# Allegro board DUBLA1 P4.brd
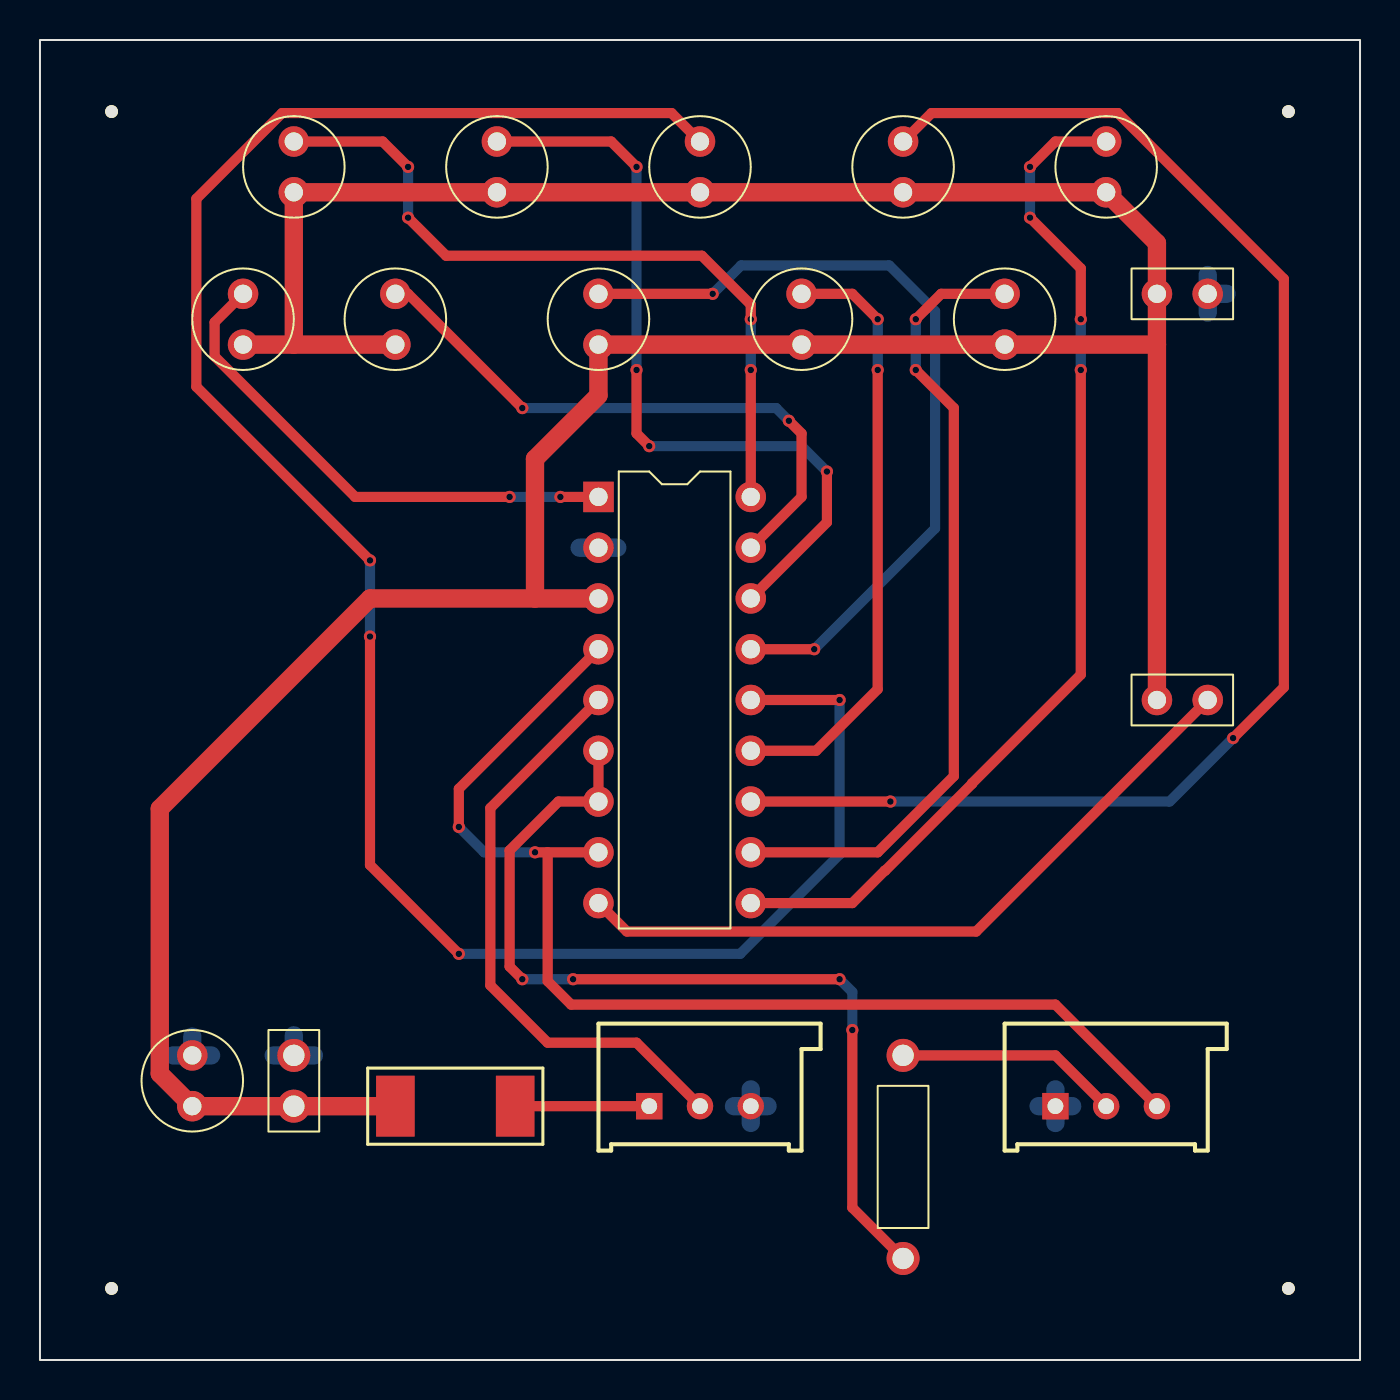
[diagram p0: board, top side]
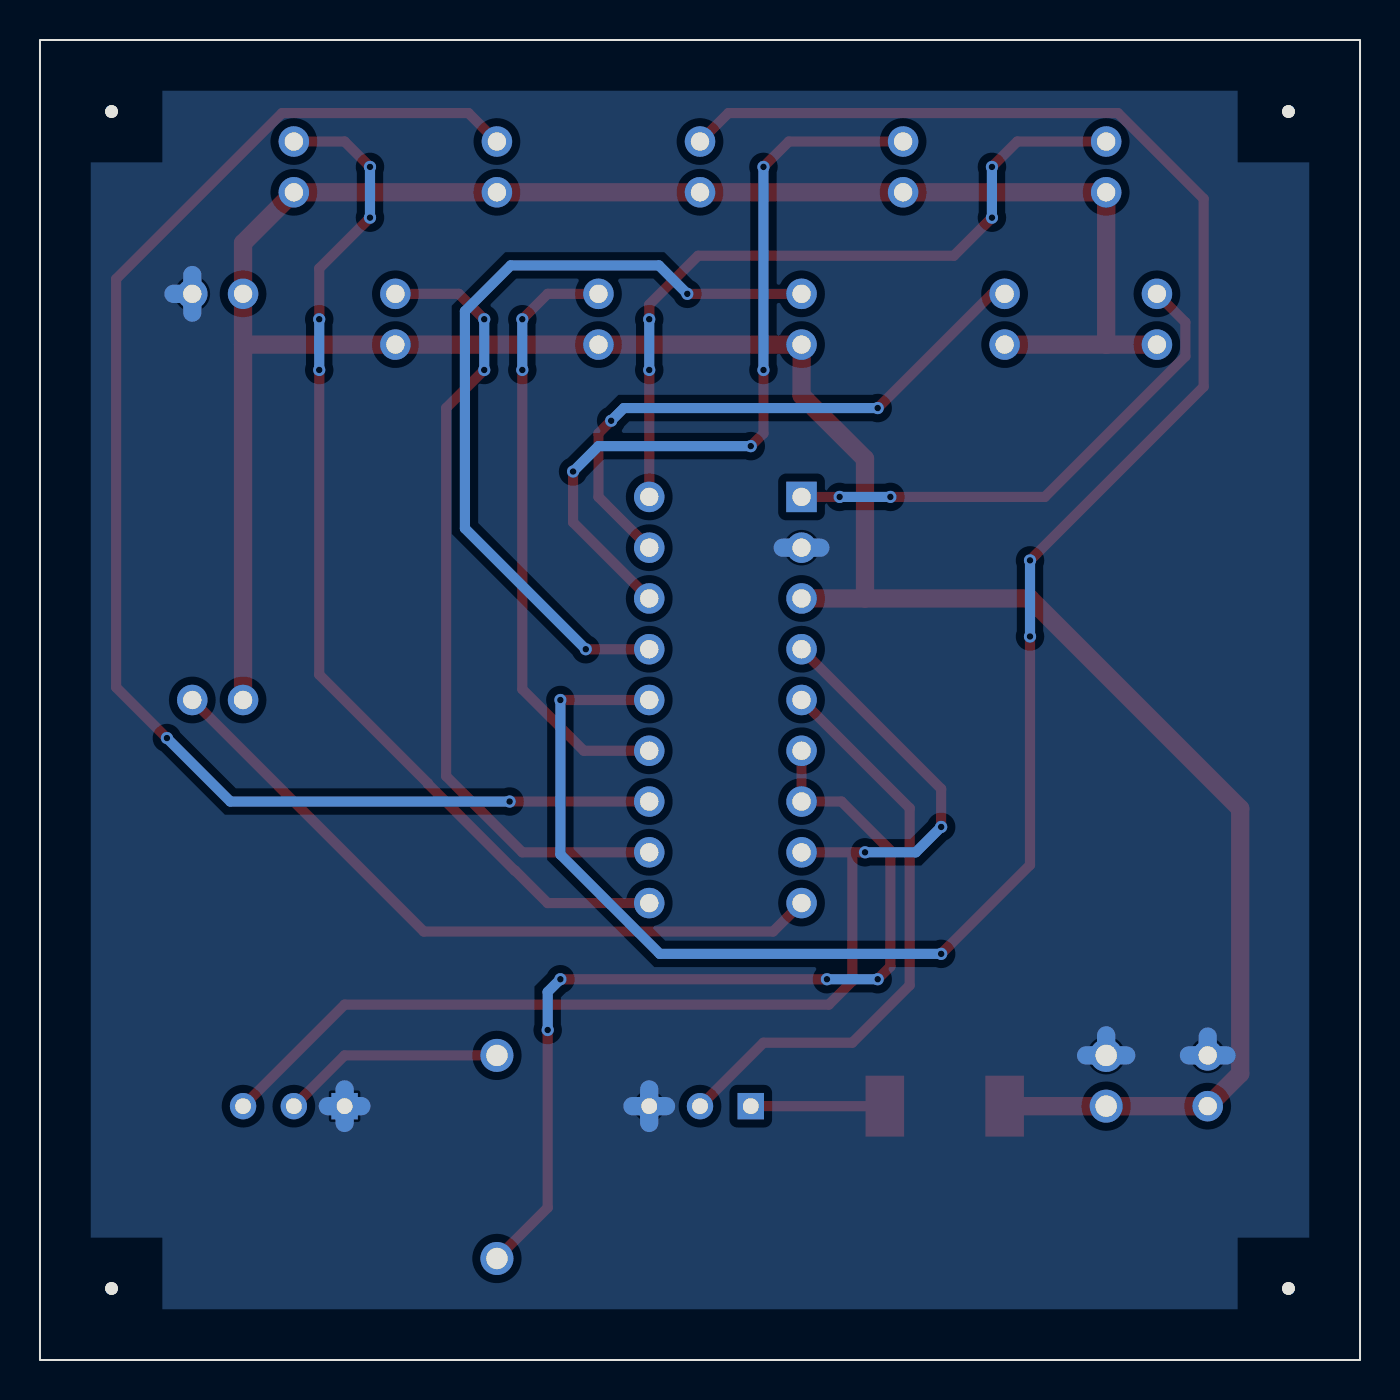
[diagram p1: board, bottom side, seen from below]

Outline 66.04 x 66.04 mm; copper layers: TOP, BOTTOM. Coordinates in mm from the lower left corner of the outline.
Outline path: rectangle 0,0 66.04,66.04

## Design rules (mm)
nets with their own width: min track width 0.508; nets N00786 N00798 N00816 N00828 N01011 N01038 N01063 N01185 N01208 N01233 N01392 N01765 N01847 N02323 N05807 N05934
nets with their own width: min track width 0.914; nets +12V GND

## Placement (name value [footprint] x y rotation side)
C1  10uF/50V  [CAP196]  7.62 12.7 0 top
C2  100nF  [CAPCK05]  12.7 12.7 0 top
CN1  BATTERY 12 VDC  [JUMPER2]  55.88 53.34 0 top
D1  YELLOW LED  [CAP196]  10.16 50.8 0 top
D2  YELLOW LED  [CAP196]  12.7 58.42 0 top
D3  YELLOW LED  [CAP196]  17.78 50.8 0 top
D4  GREEN LED  [CAP196]  22.86 58.42 0 top
D5  GREEN LED  [CAP196]  27.94 50.8 0 top
D6  GREEN LED  [CAP196]  33.02 58.42 0 top
D7  GREEN LED  [CAP196]  38.1 50.8 0 top
D8  GREEN LED  [CAP196]  43.18 58.42 0 top
D9  RED LED  [CAP196]  48.26 50.8 0 top
D10  RED LED  [CAP196]  53.34 58.42 0 top
J1  MODE JUMPER  [JUMPER2]  55.88 33.02 0 top
NOREF  -  [unnamed]  62.46 62.46 0 top
NOREF#2  -  [unnamed]  62.46 3.58 0 top
NOREF#3  -  [unnamed]  3.58 62.46 0 top
NOREF#4  -  [unnamed]  3.58 3.58 0 top
PR1  4.7K/5K PRESET  [VRES55]  50.8 12.7 0 top
PR2  4.7K/5K PRESET  [VRES55]  30.48 12.7 0 top
R1  4.7k  [SMR2512]  17.78 12.7 0 top
R2  1.2 K  [RES400]  43.18 5.08 0 top
U1  LM3914  [DIP18_3]  27.94 43.18 0 top

## Library data of the parts
C1 = CP: Tolerance: ***; User Part Number: ***
C2 = C: Tolerance: ***; User Part Number: ***
CN1 = CON2: User Part Number: ***
D1-D10 = LED: Tolerance: ***; User Part Number: ***
J1 = JUMPER_1: User Part Number: ***
PR1 PR2 = POT
R1 = R
R2 = R: Tolerance: ***; User Part Number: ***
U1 = LM3914: Tolerance: ***; User Part Number: ***

## Footprints (pads in the part's own frame, mm; a bottom-side part is the same pattern mirrored in y, then rotated)
CAP196
  round 1.524 hole 0.914: 1(0,0) 2(0,2.54)
CAPCK05
  round 1.651 hole 1.067: 1(0,0) 2(0,2.54)
DIP18_3
  rect 1.524x1.524 hole 0.914: 1(0,0)
  round 1.524 hole 0.914: 2(0,-2.54) 3(0,-5.08) 4(0,-7.62) 5(0,-10.16) 6(0,-12.7) 7(0,-15.24) 8(0,-17.78) 9(0,-20.32) 10(7.62,-20.32) 11(7.62,-17.78) 12(7.62,-15.24) 13(7.62,-12.7) 14(7.62,-10.16) 15(7.62,-7.62) 16(7.62,-5.08) 17(7.62,-2.54) 18(7.62,0)
JUMPER2
  round 1.524 hole 0.914: 1(0,0) 2(2.54,0)
RES400
  round 1.651 hole 1.067: 1(0,0) 2(0,10.16)
SMR2512
  rect 1.93x3.048 smd: 1(0,0) 2(5.994,0)
unnamed
  round 0.635 hole 3.175 unplated: (0,0)
VRES55
  rect 1.321x1.321 hole 0.787: 1(0,0)
  round 1.321 hole 0.787: 2(2.54,0) 3(5.08,0)

## Nets
+12V: C1.1 C2.1 CN1.1 D1.1 D2.1 D3.1 D4.1 D5.1 D6.1 D7.1 D8.1 D9.1 D10.1 J1.1 R1.1 U1.3
GND: C1.2 C2.2 CN1.2 PR1.1 PR2.3 U1.2(V-)
N00786: D1.2(CATHODE) U1.1
N00798: D2.2(CATHODE) U1.18
N00816: D3.2(CATHODE) U1.17
N00828: D4.2(CATHODE) U1.16
N01011: D5.2(CATHODE) U1.15
N01038: D6.2(CATHODE) U1.14
N01063: D7.2(CATHODE) U1.13
N01185: D8.2(CATHODE) U1.12
N01208: D9.2(CATHODE) U1.11
N01233: D10.2(CATHODE) U1.10
N01392: PR2.1 R1.2
N01765: R2.1 U1.6 U1.7
N01847: PR1.3 U1.4 U1.8
N02323: J1.2 U1.9
N05807: PR2.2(WIPER) U1.5
N05934: PR1.2(WIPER) R2.2

## Via types
v1: diameter 0.61, hole 0.33, TOP to BOTTOM, 34 vias

## Routing (per net, layer and track width the routed paths; a pad name or vN(x,y) marks a point on that pad's centre or on a via; arc(x,y) is an arc through that point)
+12V: length 176.3
  TOP w0.914: 12.7,50.8 D2.1 D4.1 D6.1 D8.1 D10.1 55.88,55.88 CN1.1 55.88,50.8 ; 12.7,50.8 D3.1 ; 12.7,50.8 D1.1 ; 24.77,38.1 U1.3 ; 24.77,38.1 24.77,45.09 27.94,48.26 D5.1 D7.1 D9.1 55.88,50.8 ; 24.77,38.1 16.51,38.1 5.99,27.58 5.99,14.33 C1.1 C2.1 R1.1 ; J1.1 55.88,50.8
GND: length 17.2
  BOTTOM w0.914: C1.2 8.56,15.24 ; C1.2 7.62,16.18 ; C1.2 6.68,15.24 ; 58.42,52.4 CN1.2 ; CN1.2 58.42,54.28 ; CN1.2 59.36,53.34 ; 11.7,15.24 C2.2 ; C2.2 12.7,16.24 ; C2.2 13.7,15.24 ; 28.88,40.64 U1.2 27,40.64 ; 35.56,11.86 PR2.3 ; PR2.3 34.72,12.7 ; PR2.3 35.56,13.54 ; PR2.3 36.4,12.7 ; PR1.1 51.64,12.7 ; PR1.1 50.8,11.86 ; PR1.1 49.96,12.7 ; PR1.1 50.8,13.54
N00786: length 25.8
  TOP w0.508: v1(23.5,43.18) 15.77,43.18 8.74,50.21 8.74,51.92 D1.2 ; v1(26.04,43.18) U1.1
  BOTTOM w0.508: v1(23.5,43.18) v1(26.04,43.18)
N00798: length 37.3
  TOP w0.508: v1(18.41,59.69) 17.14,60.96 D2.2 ; v1(35.56,52.07) 35.56,52.8 33.12,55.24 20.32,55.24 v1(18.41,57.15) ; v1(35.56,49.53) U1.18
  BOTTOM w0.508: v1(18.41,59.69) v1(18.41,57.15) ; v1(35.56,52.07) v1(35.56,49.53)
N00816: length 30
  TOP w0.508: v1(37.47,46.99) 38.1,46.35 38.1,43.18 U1.17 ; D3.2 18.41,53.34 v1(24.13,47.62)
  BOTTOM w0.508: v1(24.13,47.62) 36.83,47.62 v1(37.47,46.99)
N00828: length 39.1
  TOP w0.508: v1(39.37,44.45) 39.37,41.91 U1.16 ; v1(29.84,49.53) 29.84,46.35 v1(30.48,45.72) ; D4.2 28.57,60.96 v1(29.84,59.69)
  BOTTOM w0.508: v1(30.48,45.72) 38.1,45.72 v1(39.37,44.45) ; v1(29.84,59.69) v1(29.84,49.53)
N01011: length 41
  TOP w0.508: v1(38.73,35.56) U1.15 ; D5.2 v1(33.66,53.34)
  BOTTOM w0.508: v1(38.73,35.56) 44.78,41.61 44.78,52.47 42.49,54.76 35.08,54.76 v1(33.66,53.34)
N01038: length 104.1
  TOP w0.508: v1(40.01,33.02) U1.14 ; v1(20.95,20.32) 16.51,24.77 v1(16.51,36.2) ; D6.2 31.6,62.38 12.11,62.38 7.82,58.09 7.82,48.69 v1(16.51,40.01)
  BOTTOM w0.508: v1(40.01,33.02) 40.01,25.29 35.03,20.32 v1(20.95,20.32) ; v1(16.51,40.01) v1(16.51,36.2)
N01063: length 30.5
  TOP w0.508: v1(41.91,52.07) 40.64,53.34 D7.2 ; v1(41.91,49.53) 41.91,33.56 38.83,30.48 U1.13
  BOTTOM w0.508: v1(41.91,52.07) v1(41.91,49.53)
N01185: length 72.5
  TOP w0.508: v1(42.55,27.94) U1.12 ; v1(59.69,31.11) 62.23,33.66 62.23,54.08 53.93,62.38 44.6,62.38 D8.2
  BOTTOM w0.508: v1(59.69,31.11) 56.52,27.94 v1(42.55,27.94)
N01208: length 40.4
  TOP w0.508: U1.11 41.91,25.4 45.72,29.21 45.72,47.62 v1(43.81,49.53) ; D9.2 45.09,53.34 v1(43.81,52.07)
  BOTTOM w0.508: v1(43.81,52.07) v1(43.81,49.53)
N01233: length 52
  TOP w0.508: U1.10 40.64,22.86 42.27,24.49 42.29,24.49 46.63,28.83 46.63,28.85 52.07,34.29 v1(52.07,49.53) ; v1(49.53,59.69) 50.8,60.96 D10.2 ; v1(52.07,52.07) 52.07,54.61 v1(49.53,57.15)
  BOTTOM w0.508: v1(49.53,59.69) v1(49.53,57.15) ; v1(52.07,52.07) v1(52.07,49.53)
N01392: length 6.7
  TOP w0.508: R1.2 PR2.1
N01765: length 45.9
  TOP w0.508: v1(40.64,16.51) 40.64,7.62 R2.1 ; U1.6 U1.7 25.94,27.94 23.5,25.5 23.5,19.68 v1(24.13,19.05) ; v1(40.01,19.05) v1(26.67,19.05)
  BOTTOM w0.508: v1(40.01,19.05) 40.64,18.41 v1(40.64,16.51) ; v1(26.67,19.05) v1(24.13,19.05)
N01847: length 58.8
  TOP w0.508: PR1.3 50.8,17.78 26.57,17.78 25.4,18.95 25.4,25.4 ; 25.4,25.4 v1(24.77,25.4) ; 25.4,25.4 U1.8 ; U1.4 20.95,28.57 v1(20.95,26.67)
  BOTTOM w0.508: v1(20.95,26.67) 22.23,25.4 v1(24.77,25.4)
N02323: length 35.9
  TOP w0.508: J1.2 46.84,21.44 29.36,21.44 U1.9
N05807: length 29.5
  TOP w0.508: PR2.2 29.84,15.88 25.4,15.88 22.53,18.75 22.53,27.61 U1.5
N05934: length 11.2
  TOP w0.508: PR1.2 50.8,15.24 R2.2

## Copper pours and planes (outline as drawn; the poured copper is in the pictures)
GND on BOTTOM: 2.54,2.54 2.54,63.5 63.5,63.5 63.5,2.54

## Text on the board
XSECTION_CHART: *  SURFACE | L1 TOP CONDUCTOR | *  DIELECTRIC | L2 BOTTOM CONDUCTOR | DESIGN CROSS SECTION CHART | ___________________________ | TOTAL THICKNESS 10.4 MIL | 1-2
DEVICE_TYPE_TOP: FIGURE | FINISHED_SIZE | 13.0 | 31.0 | 36.0 | 42.0 | 125.0 | DRILL CHART: TOP to BOTTOM | ALL UNITS ARE IN MILS | PLATED | NON-PLATED | QTY | 34 | 6 | 44 | 4
